# Altium PCB JTAG_connector1.PcbDoc
Units mil, origin at the board's own origin, x right, y up, seen from the top; angles counter-clockwise.
Board outline 2000 x 2000 mil, 2 copper layers (Top Layer, Bottom Layer); 2 components, 6 nets, 30 pads, 0 vias.
Unrouted connection lines stored in the file: 1.
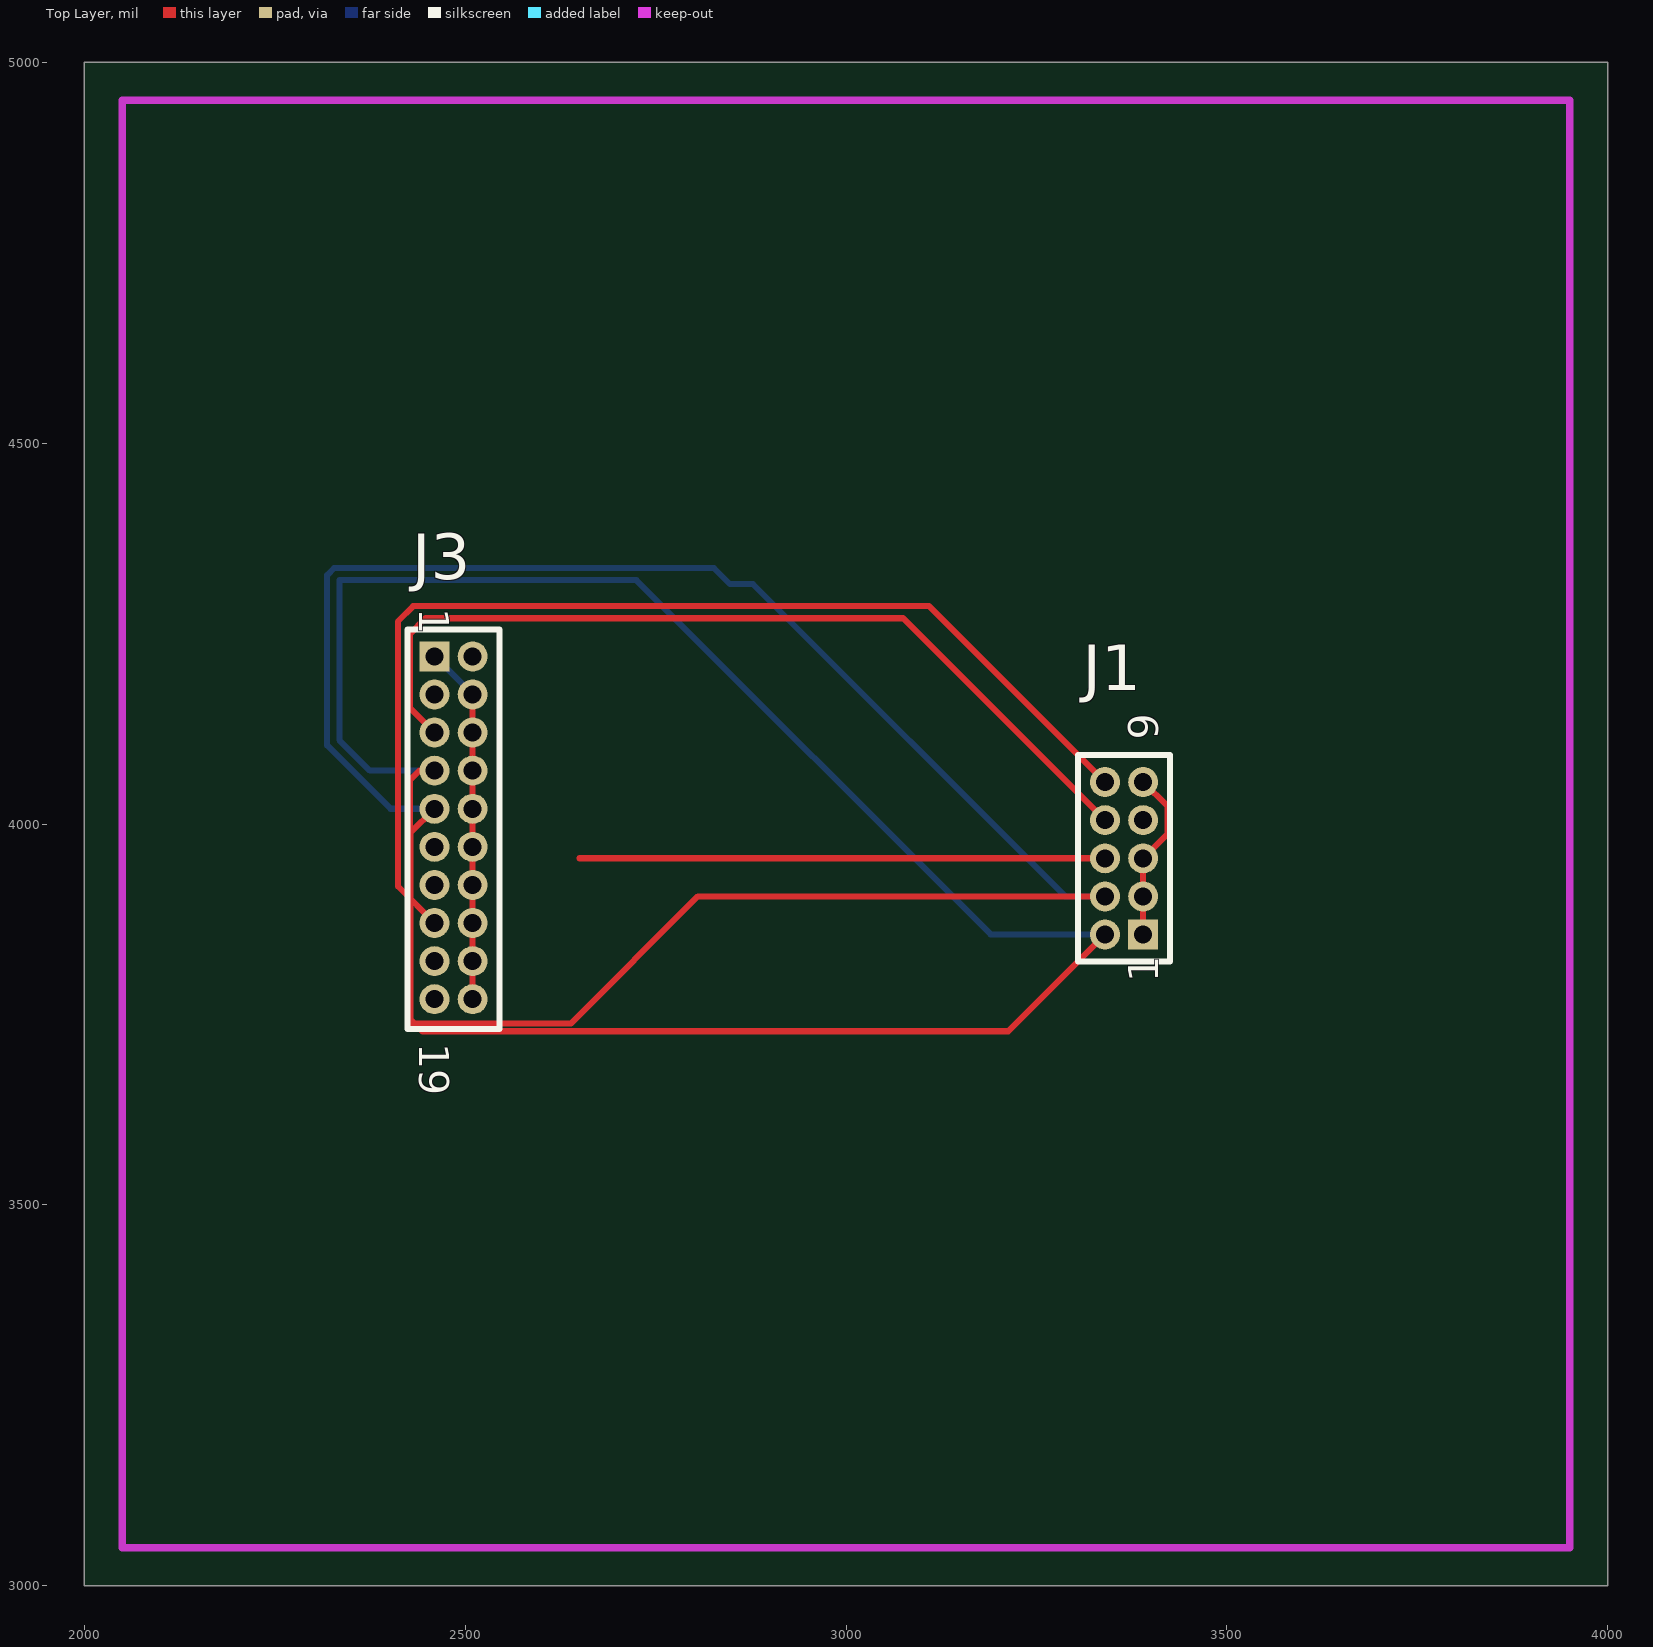
[diagram p0: Top Layer view]
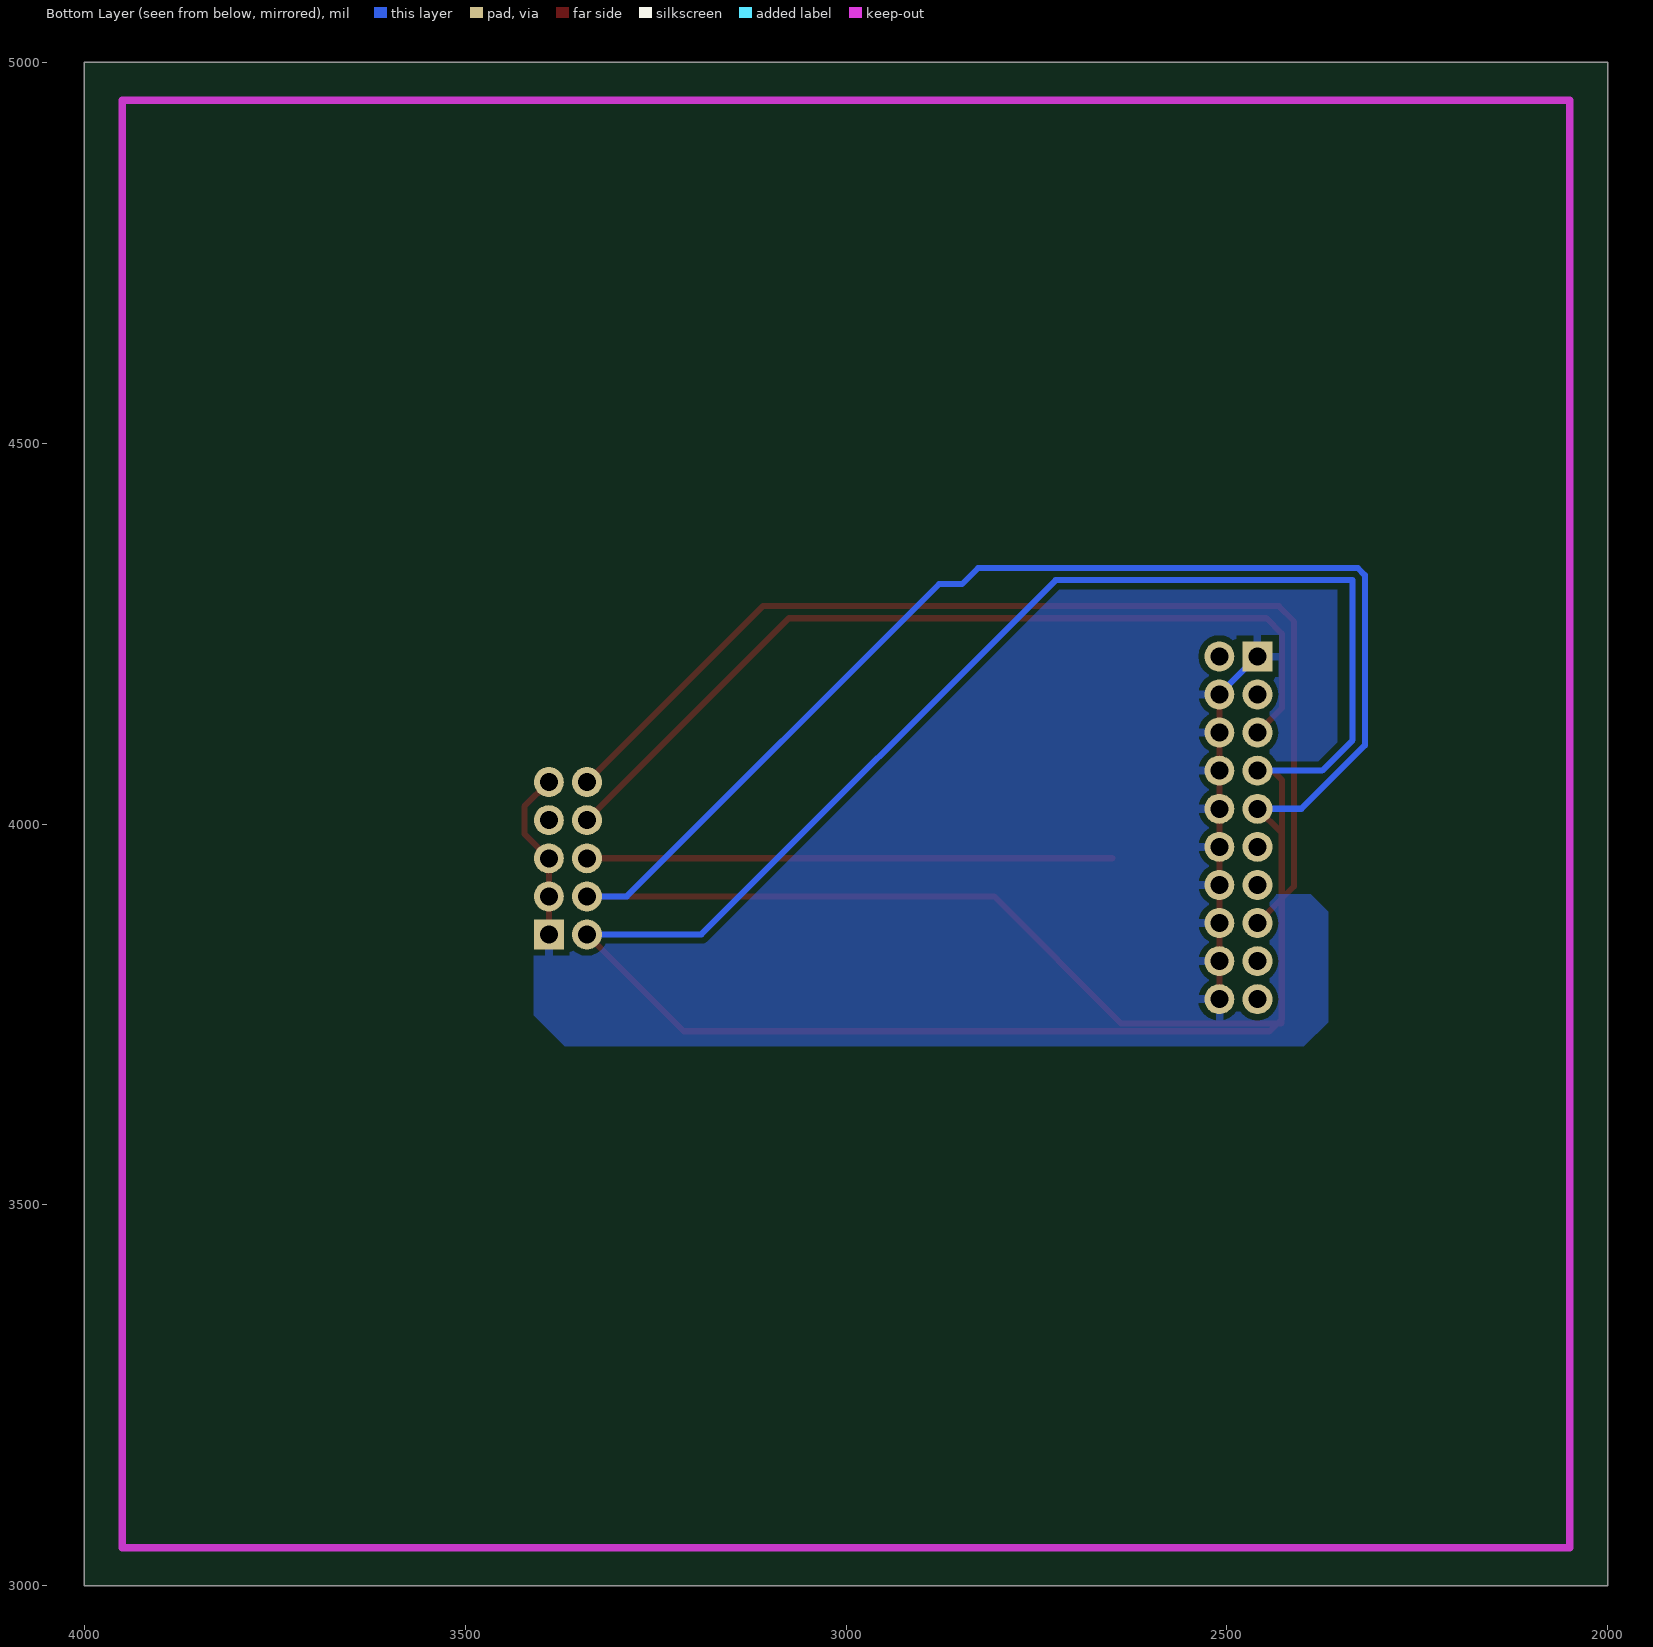
[diagram p1: Bottom Layer view, seen from below]

## Layer stack, top to bottom
Top Layer: signal copper 1.4
Dielectric: dielectric 12.6, FR-4, Dk 4.8
Bottom Layer: signal copper 1.4

## Board outline
2000,3000 4000,3000 4000,5000 2000,5000

## Design rules (kind name [scope] priority, off if disabled: settings)
Clearance [All] p1: gap=8
PolygonConnect [All] p1: connectstyle=Relief reliefconductorwidth=10 reliefentries=4 polygonreliefangle="90 Angle"
RoomDefinition JTAG_connector1 [InComponentClass('JTAG_connector1')] p1: confinementstyle=ConfineIn formatcopy=TRUE lockcomponents=FALSE outline 4255,2950 4575,2950 4575,3710 4255,3710
RoutingVias [All] p1: holewidth=25 width=40 viastyle="Through Hole" minholewidth=28 minwidth=50 maxholewidth=28 maxwidth=50
SilkscreenOverComponentPads [All] p1: minsilkscreentomaskgap=10
SolderMaskExpansion [All] p1: expansion=4
Width [All] p1: maxlimit=8 minlimit=8 preferedwidth=8
27 further rules are at their usual default settings.

## Components (designator, comment, footprint, x,y, rotation, side; value= is the part's Value field where it differs from the comment)
J1 "MHDR2X5" MHDR2X5 3390,3855 r90 top
J3 "MHDR2X10" MHDR2X10 2460,4220 r270 top

## Footprints (in the part's own frame and the unit in brackets; to place one, negate y for a bottom-side part, rotate by r counter-clockwise, add the part's x,y. Pads: shape width x height; smd on the part's side, far side on the other; paste and mask are expansions set on the pad)
MHDR2X5 [mm] "Connector; Header; 5x2 Position"
  rect 1x1 hole 0.6: 1(0,0)
  round 1 hole 0.6: 2(0,1.27) 3(1.27,0) 4(1.27,1.27) 5(2.54,0) 6(2.54,1.27) 7(3.81,0) 8(3.81,1.27) 9(5.08,0) 10(5.08,1.27)
  silkscreen extent -0.9,-0.9 5.98,2.17
MHDR2X10 [mm] "Connector; Header; 10x2 Position"
  rect 1x1 hole 0.6: 1(0,0)
  round 1 hole 0.6: 2(0,1.27) 3(1.27,0) 4(1.27,1.27) 5(2.54,0) 6(2.54,1.27) 7(3.81,0) 8(3.81,1.27) 9(5.08,0) 10(5.08,1.27) 11(6.35,0) 12(6.35,1.27) 13(7.62,0) 14(7.62,1.27) 15(8.89,0) 16(8.89,1.27) 17(10.16,0) 18(10.16,1.27) 19(11.43,0) 20(11.43,1.27)
  silkscreen extent -0.9,-0.9 12.43,2.17

## Part data
J1: "Header, 5-Pin, Dual row"
J3: "Header, 10-Pin, Dual row"

## Nets (pads, with @x,y where several pads share a name; then routed paths per layer and width w, separated by ;. In a path a pad name is that pad's centre, name@x,y a point inside that pad or via, vN(x,y) a via of type N, cw(c..) or ccw(c..) an arc to the next point about the centre after c; other vN are vias at no path point)
GND: J1.1 J1.3 J1.5 J1.9 J3.1 J3.4 J3.6 J3.8 J3.10 J3.12 J3.14 J3.16 J3.18 J3.20 | length 697.2
  Top Layer w8: J3.20 J3.18 J3.16 J3.14 J3.12 J3.10 J3.8 J3.6 J3.4 ; J1.1 J1.3 J1.5 3422,3987 3422,4023 J1.9
  Bottom Layer w8: J3.1 J3.4
NetJ1_2: J1.2 J3.7 | length 2871.4
  Top Layer w8: J3.7 2440,4070 2428,4058 2428,3744 2444,3728 3213,3728 J1.2
  Bottom Layer w8: J3.7 2375,4070 2335,4110 2335,4320 2725,4320 3190,3855 J1.2
NetJ1_4: J1.4 J3.9 | length 2878.2
  Top Layer w8: J3.9 2428.31,3988.31 2428.31,3738 2638.69,3738 2805.69,3905 J1.4
  Bottom Layer w8: J3.9 2402.37,4020 2319,4103.37 2319,4326.63 2328.37,4336 2826.63,4336 2847.63,4315 2877.69,4315 3287.69,3905 J1.4
NetJ1_6: J1.6 J3.13 | length 690
  Top Layer w8: 2650,3955 J1.6
NetJ1_8: J1.8 J3.5 | length 1173.3
  Top Layer w8: J3.5 2428,4152 2428,4250 2448,4270 3075,4270 J1.8
NetJ1_10: J1.10 J3.15 | length 1447.8
  Top Layer w8: J3.15 2412,3918 2412,4266 2432,4286 3109,4286 J1.10
pads on no net: J1.7 J3.2 J3.3 J3.11 J3.17 J3.19

## Polygon pours and split planes (outlines as drawn)
GND on Bottom Layer "Gnd Plane" (solid, remove dead copper): 2355,4410 3485,4410 3485,3625 3490,3620 2355,3620 2355,4410

## Keep-outs
Keep-Out Layer:
  lines w10: 2050,3050 2050,4950 3950,4950 3950,3050 2050,3050

## Silkscreen, mask and mechanical layers (free items; w line width, h text height)
Drill Drawing:
  text ".LEGEND" at 4200,3200 h60
  text "Drill Drawing." at 4200,3100 h60

## Dimensions
2050,3050 to 2050,4950 on Mechanical 1
2050,3050 to 3950,3050 on Mechanical 1

## Text inside footprints (layer, text, board x,y; h text height)
J1: Top Overlay "1" at 3410,3792.01 h39.37 r90; Top Overlay "9" at 3410,4110.91 h39.37 r90
J3: Top Overlay "1" at 2440,4282.99 h39.37 r270; Top Overlay "19" at 2440,3712.13 h39.37 r270